# EAGLE board NTH-d (EAGLE 4.16)
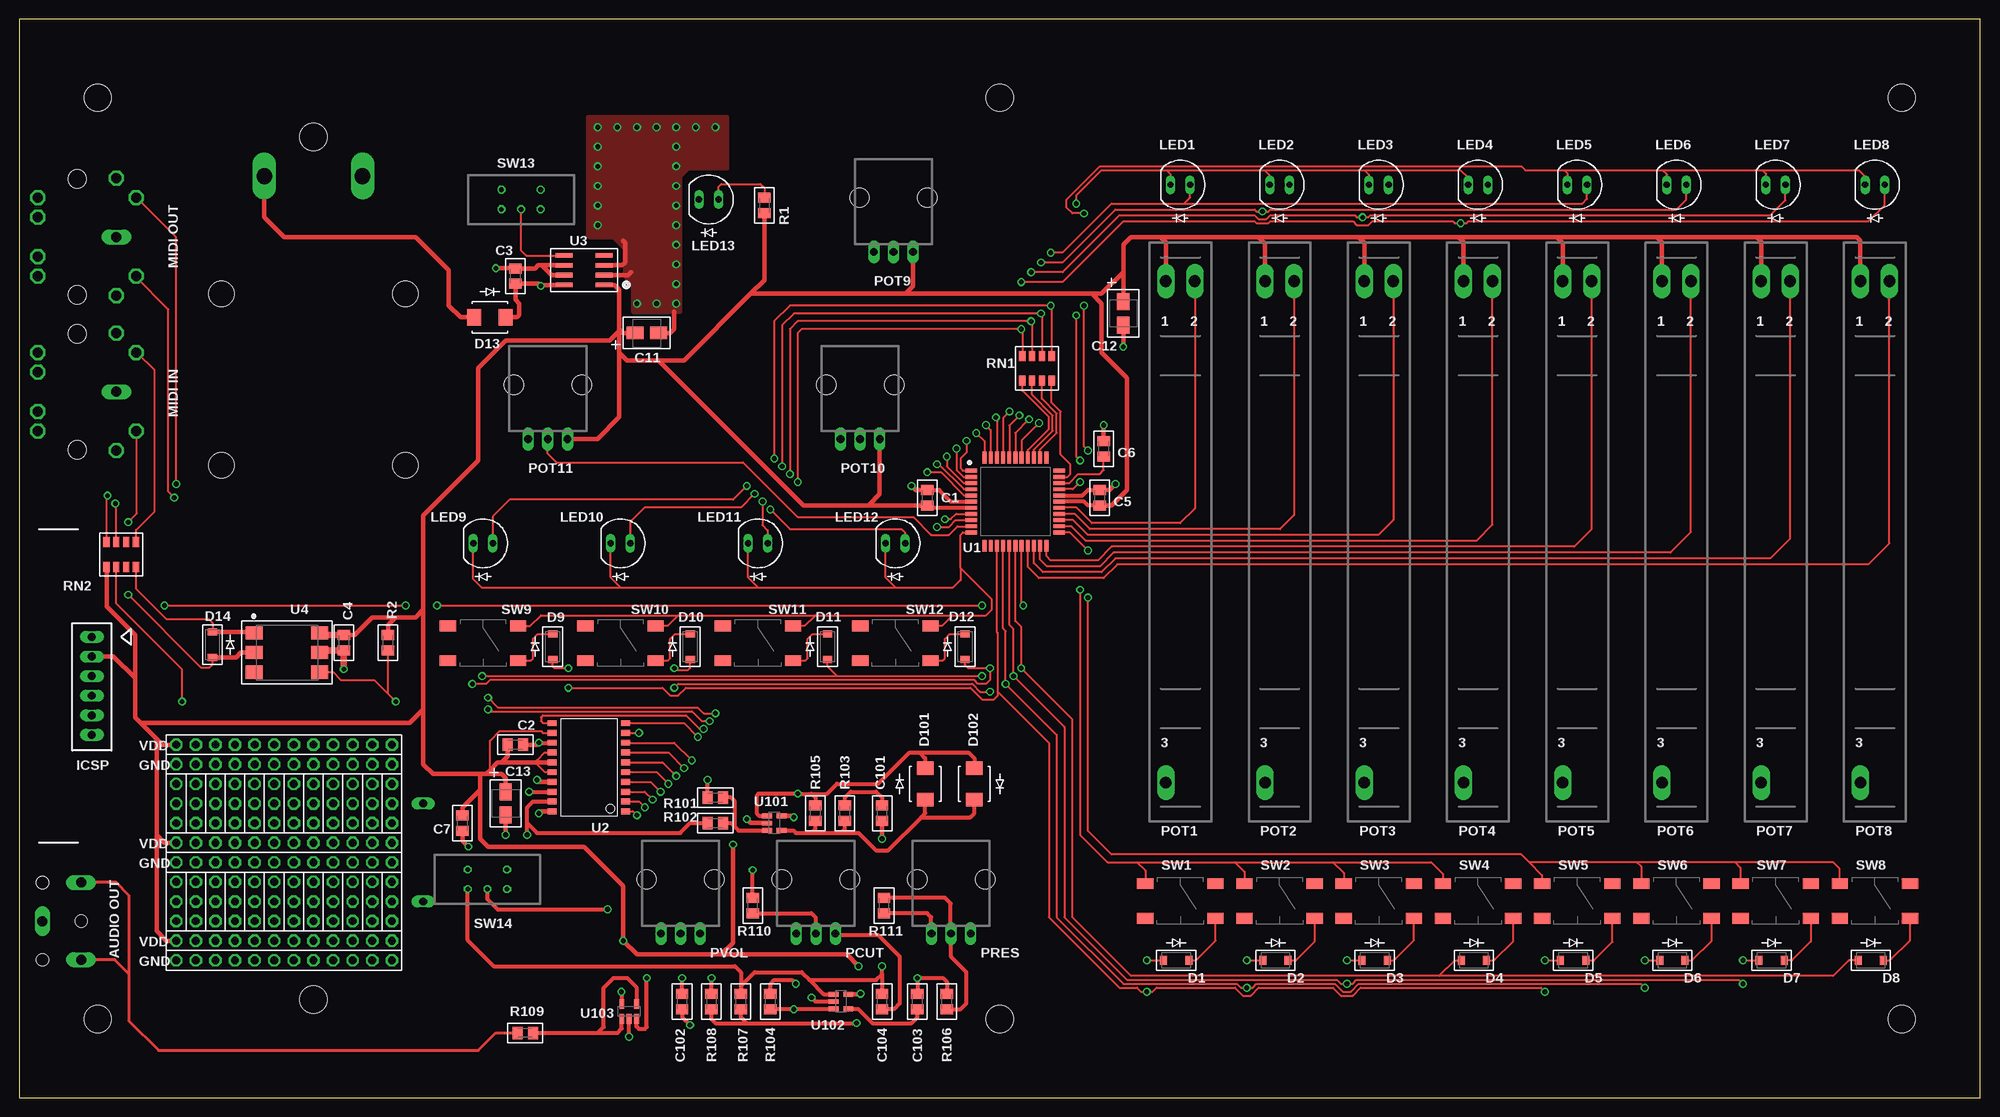
[diagram p0: board, top side]
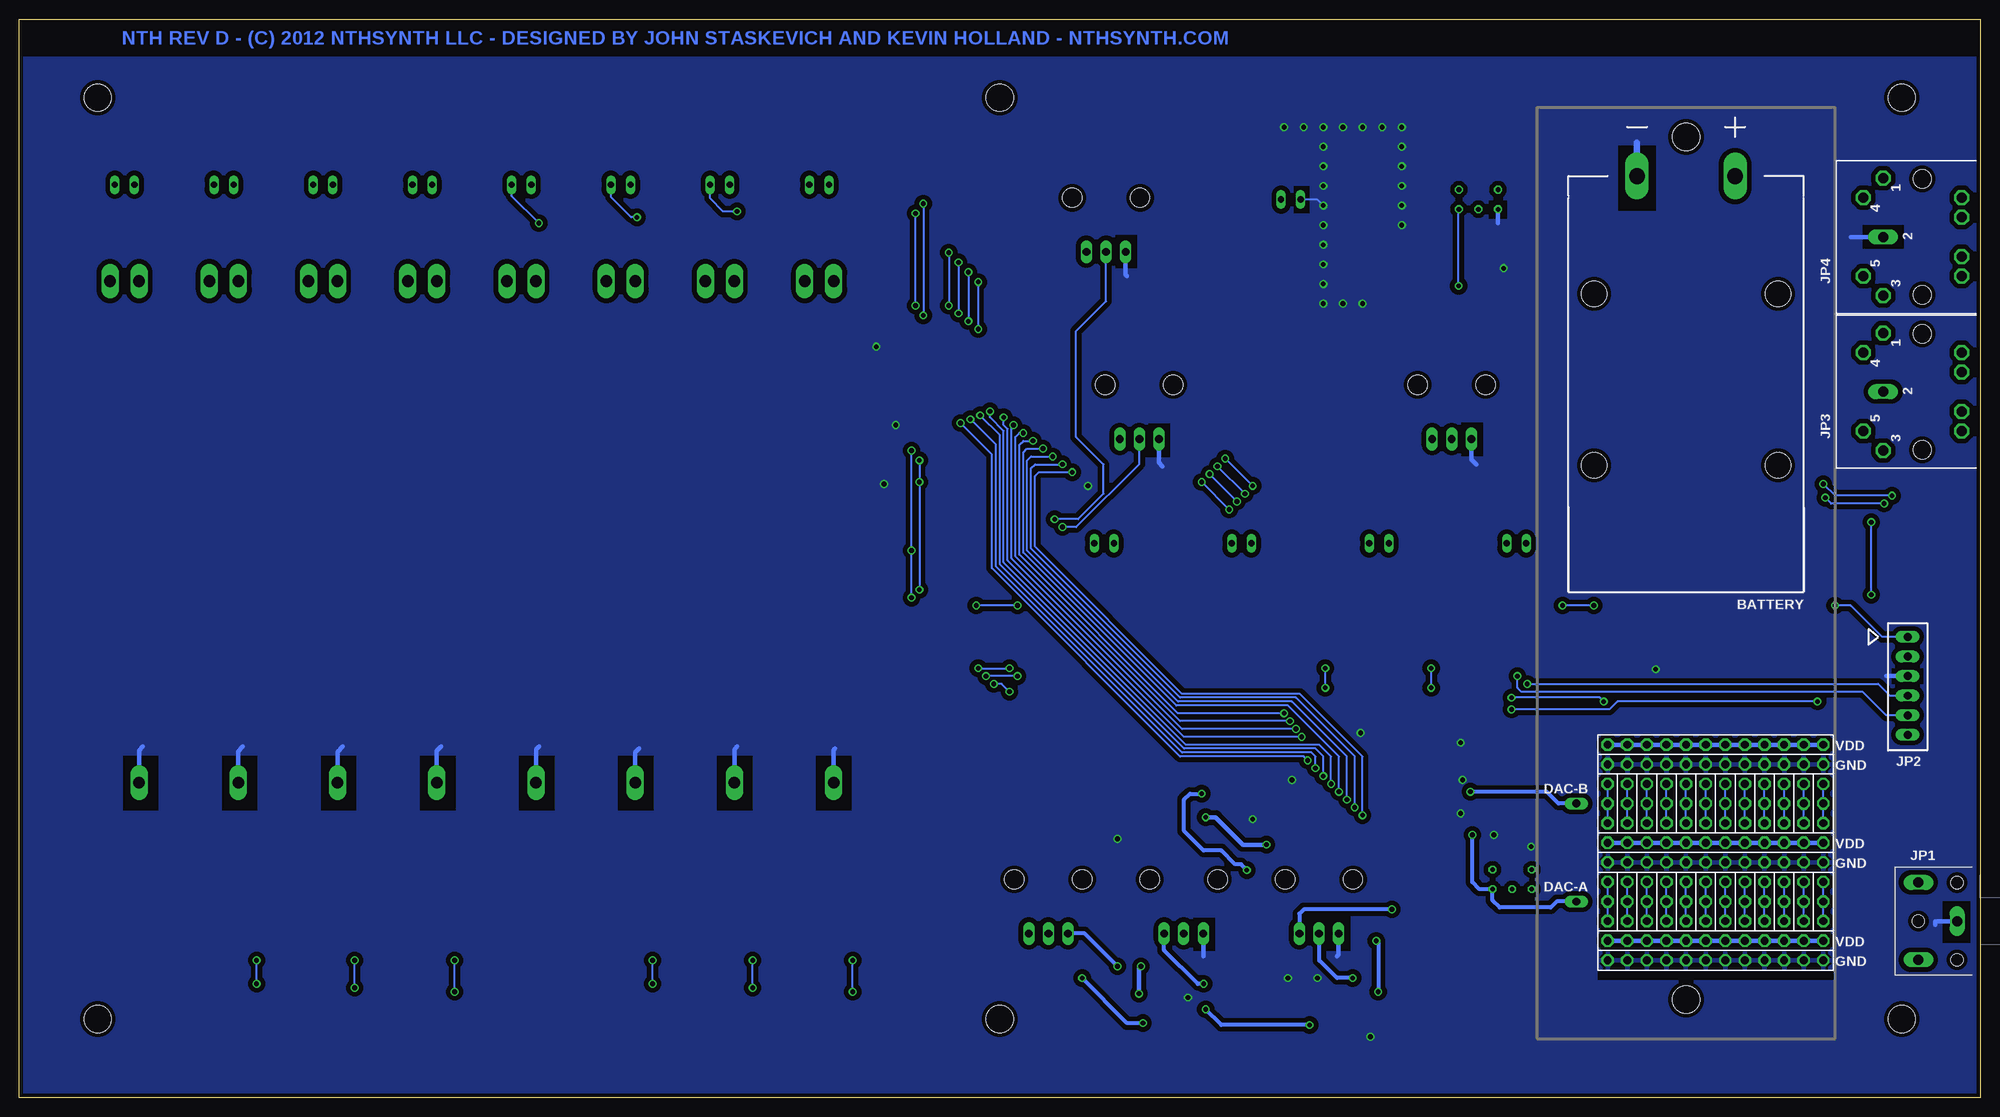
[diagram p1: board, bottom side, seen from below]

Size 254 x 139.7 mm. Coordinates in mm from the lower left corner, seen from the top.
Outline: 0,0 254,0 254,139.7 0,139.7 0,0
Copper layers (1*16): Top 0.0178mm / dielectric 1.4986mm / Bottom 0.0178mm
Design rules "SSC-EAGLE-2Lyr_v1.0.0.3": minimum track width 6mil, minimum drill 14mil, track to track 10mil, track to pad 10mil, pad to pad 10mil, via to via 10mil, smd to smd 10mil, copper to edge 20mil, drill to drill 16mil, minimum pad ring 8mil, minimum via ring 8mil, stop-mask expansion 3mil, vias tented up to drill 0mil, thermal gap 10mil
Net classes: 0 default: width 0.254 mm, drill 0.254 mm, clearance 0.305 mm; 1 power: width 0.508 mm, drill 0.61 mm, clearance 0.61 mm; 3 VDD: width 0.254 mm, drill 0.305 mm, clearance 0.61 mm
Holes 3.56 mm at 243.84,10.16 243.84,129.54 10.16,129.54 10.16,10.16 127,129.54 127,10.16 38.1,124.46 38.1,12.7
bRestrict: area 109.2,107.4 to 112,111.8; area 64.4,83.1 to 67.2,87.4; area 105,83 to 107.7,87.3; area 61.3,113.9 to 63.7,116.2; area 146.2,37.2 to 150.8,44.2; area 159,37.2 to 163.6,44.2; area 171.9,37.2 to 176.4,44.2; area 184.7,37.2 to 189.3,44.2; area 197.5,37.2 to 202.1,44.2; area 210.3,37.2 to 214.9,44.2; area 223.2,37.2 to 227.7,44.2; area 236,37.2 to 240.6,44.2; 8 more areas

## Footprints (pad centres in the part's own frame; a part is rotated, then mirrored left to right if it is on the bottom)
C0805K = smd 1.3 x 1.6: 1 -1,0; 2 1,0
NICHICON-3.0 = smd 1.6 x 2.2: P$1 0,1.5; P$2 0,-1.5
SOD123 = smd 1.219 x 0.914: P$1 0,1.638; P$2 0,-1.638
S2 = smd 2.159 x 1.778: P$1 0,2.032; P$2 0,-2.032
SOD123-MIRROR = smd 1.219 x 0.914: P$1 0,1.638; P$2 0,-1.638
WIREPAD-NICE = drill 1.016 long: P$1 0,0
KEYSTONE-1294-B = drill 2.032 long: P$1 6.35,15.24; P$2 -6.35,15.24 | hole 3.302: 11.913,0; -11.913,0; -11.913,-22.225; 11.913,-22.225
1,6/0,9 = drill 1.016 pad 1.6 octagon: 1 0,0
STX-3100-3N = drill 1.3 long: P$1 0,0; P$2 5,5; P$3 5,-5 | hole 1.6: 5,0; 0,-5; 0,5
MIDI-PCB = drill 1.295 octagon: 1 7.62,5.08; 3 -7.62,5.08; 4 5.08,7.62; 5 -5.08,7.62; PE -2.54,-5.08; PE1 -5.08,-5.08; PE@ 2.54,-5.08; PE@1 5.08,-5.08 | drill 1.295 long: 2 0,5.08 | hole 2.388: -7.518,0; 7.518,0
LED5MM = drill 0.813 long: A 1.27,0; K -1.27,0
9MM-POT = drill 1 long: P$1 0,-7.01; P$2 2.54,-7.01; P$3 -2.54,-7.01 | hole 2.54: -4.4,0; 4.4,0
SLIDE-POT = drill 1.499 long: P$1 -1.875,32.5; P$4 1.875,32.5; P$6 -1.875,-32.5
CTS-744 = smd 1.3 x 0.8: P$4 -1.6,-0.635; P$5 -1.6,-1.905; P$6 -1.6,0.635; P$7 -1.6,1.905; P$8 1.6,0.635; P$9 1.6,1.905; P$10 1.6,-0.635; P$11 1.6,-1.905
TL3301-B = smd 1.4 x 2.1: P$1 2.25,4.55; P$2 -2.25,4.55; P$3 -2.25,-4.55; P$4 2.25,-4.55
G12-ROCKER = drill 0.61 octagon: P$2 1.27,0; P$3 1.27,2.54; P$4 -1.27,2.54; P$5 -1.27,-2.54; P$6 1.27,-2.54
TQFP44 = smd 1.5 x 0.5: P$1 5.7,0; P$2 -5.7,0; P$5 5.7,-0.8; P$6 5.7,-1.6; P$7 5.7,-2.4; P$8 5.7,-3.2; P$9 5.7,-4; P$10 5.7,0.8; P$11 5.7,1.6; P$12 5.7,2.4; P$13 5.7,3.2; P$14 5.7,4; P$25 -5.7,-0.8; P$26 -5.7,-1.6; P$27 -5.7,-2.4; P$28 -5.7,-3.2; P$29 -5.7,-4; P$30 -5.7,0.8; P$31 -5.7,1.6; P$32 -5.7,2.4; P$33 -5.7,3.2; P$34 -5.7,4 | smd 0.5 x 1.5: P$3 0,-5.7; P$4 0,5.7; P$15 0.8,5.7; P$16 1.6,5.7; P$17 2.4,5.7; P$18 3.2,5.7; P$19 4,5.7; P$20 -0.8,5.7; P$21 -1.6,5.7; P$22 -2.4,5.7; P$23 -3.2,5.7; P$24 -4,5.7; P$35 -0.8,-5.7; P$36 -1.6,-5.7; P$37 -2.4,-5.7; P$38 -3.2,-5.7; P$39 -4,-5.7; P$40 0.8,-5.7; P$41 1.6,-5.7; P$42 2.4,-5.7; P$43 3.2,-5.7; P$44 4,-5.7
SO20L = smd 0.762 x 1.143: 1 -5.08,-5.131; 2 -3.81,-5.131; 3 -2.54,-5.131; 4 -1.27,-5.131; 5 0,-5.131; 6 1.27,-5.131; 7 2.54,-5.131; 8 3.81,-5.131; 9 5.08,-5.131; 10 6.35,-5.131; 11 6.35,4.369; 12 5.08,4.394; 13 3.81,4.394; 14 2.54,4.394; 15 1.27,4.394; 16 0,4.394; 17 -1.27,4.394; 18 -2.54,4.394; 19 -3.81,4.394; 20 -5.08,4.394
SO-8 = smd 2.2 x 0.6: 1 2.6,-1.905; 2 2.6,-0.635; 3 2.6,0.635; 4 2.6,1.905; 5 -2.6,1.905; 6 -2.6,0.635; 7 -2.6,-0.635; 8 -2.6,-1.905
SMT-6 = smd 2.2 x 1.7: P$4 4.25,2.54; P$5 4.25,0; P$6 4.25,-2.54; P$7 -4.25,-2.54; P$8 -4.25,0; P$9 -4.25,2.54
SOT23-5 = smd 0.635 x 1.27: 1 0.95,-0.95; 2 -0.95,-0.95; 3 -0.95,0.95; 4 0,0.95; 5 0.95,0.95

## Placement (x,y rotation side)
C1  [C0805K]  117.6,77.72 270 top
C2  [C0805K]  64.26,45.72 180 top
C3  [C0805K]  64.26,106.43 270 top
C4  [C0805K]  42.04,58.93 90 top
C5  [C0805K]  139.95,77.72 270 top
C6  [C0805K]  140.46,84.07 270 top
C7  [C0805K]  57.4,35.56 90 top
C11  [NICHICON-3.0]  81.28,99.06 90 top
C12  [NICHICON-3.0]  143,101.6 0 top
C13  [NICHICON-3.0]  62.99,38.1 0 top
C101  [C0805K]  111.76,36.83 90 top
C102  [C0805K]  85.85,12.45 90 top
C103  [C0805K]  116.33,12.45 90 top
C104  [C0805K]  111.76,12.45 90 top
D1  [SOD123]  149.86,17.78 270 top
D2  [SOD123]  162.71,17.78 270 top
D3  [SOD123]  175.56,17.78 270 top
D4  [SOD123]  188.42,17.78 270 top
D5  [SOD123]  201.27,17.78 270 top
D6  [SOD123]  214.12,17.78 270 top
D7  [SOD123]  226.97,17.78 270 top
D8  [SOD123]  239.83,17.78 270 top
D9  [SOD123]  69.09,58.42 0 top
D10  [SOD123]  86.89,58.42 0 top
D11  [SOD123]  104.7,58.42 0 top
D12  [SOD123]  122.5,58.42 0 top
D13  [S2]  60.96,101.09 270 top
D14  [SOD123-MIRROR]  25.02,58.67 0 top
D101  [S2]  117.35,40.64 0 top
D102  [S2]  123.7,40.64 180 top
DAC-A  [WIREPAD-NICE]  52.32,25.4 90 top
DAC-B  [WIREPAD-NICE]  52.32,38.1 90 top
E$1  [KEYSTONE-1294-B]  38.1,104.14 0 bottom
E$11  [1,6/0,9]  22.86,30.48 0 top
E$12  [WIREPAD-NICE]  9.4,59.69 270 top
E$13  [1,6/0,9]  22.86,33.02 0 top
E$14  [1,6/0,9]  22.86,35.56 0 top
E$15  [1,6/0,9]  20.32,30.48 0 top
E$16  [1,6/0,9]  22.86,27.94 0 top
E$17  [1,6/0,9]  20.32,27.94 0 top
E$18  [1,6/0,9]  20.32,33.02 0 top
E$19  [1,6/0,9]  20.32,35.56 0 top
E$20  [1,6/0,9]  22.86,25.4 0 top
E$21  [1,6/0,9]  20.32,25.4 0 top
E$22  [1,6/0,9]  20.32,22.86 0 top
E$23  [1,6/0,9]  22.86,22.86 0 top
E$24  [1,6/0,9]  22.86,38.1 0 top
E$25  [1,6/0,9]  22.86,40.64 0 top
E$26  [1,6/0,9]  20.32,38.1 0 top
E$27  [1,6/0,9]  20.32,40.64 0 top
E$28  [1,6/0,9]  25.4,27.94 0 top
E$29  [1,6/0,9]  25.4,30.48 0 top
E$30  [1,6/0,9]  25.4,33.02 0 top
E$31  [1,6/0,9]  25.4,35.56 0 top
E$32  [1,6/0,9]  25.4,25.4 0 top
E$33  [1,6/0,9]  25.4,22.86 0 top
E$34  [1,6/0,9]  25.4,38.1 0 top
E$35  [1,6/0,9]  25.4,40.64 0 top
E$36  [1,6/0,9]  27.94,27.94 0 top
E$37  [1,6/0,9]  27.94,30.48 0 top
E$38  [WIREPAD-NICE]  9.4,46.99 270 top
E$39  [1,6/0,9]  27.94,33.02 0 top
E$40  [1,6/0,9]  27.94,35.56 0 top
E$41  [1,6/0,9]  27.94,25.4 0 top
E$42  [1,6/0,9]  27.94,22.86 0 top
E$43  [1,6/0,9]  27.94,38.1 0 top
E$44  [1,6/0,9]  27.94,40.64 0 top
E$45  [1,6/0,9]  30.48,27.94 0 top
E$46  [1,6/0,9]  30.48,30.48 0 top
E$47  [1,6/0,9]  30.48,33.02 0 top
E$48  [1,6/0,9]  30.48,35.56 0 top
E$49  [1,6/0,9]  30.48,25.4 0 top
E$50  [1,6/0,9]  30.48,22.86 0 top
E$51  [1,6/0,9]  30.48,38.1 0 top
E$52  [1,6/0,9]  30.48,40.64 0 top
E$53  [1,6/0,9]  33.02,27.94 0 top
E$54  [1,6/0,9]  33.02,30.48 0 top
E$55  [1,6/0,9]  33.02,33.02 0 top
E$56  [1,6/0,9]  33.02,35.56 0 top
E$57  [1,6/0,9]  33.02,25.4 0 top
E$58  [1,6/0,9]  33.02,22.86 0 top
E$59  [1,6/0,9]  33.02,38.1 0 top
E$60  [1,6/0,9]  33.02,40.64 0 top
E$61  [1,6/0,9]  22.86,43.18 0 top
E$62  [1,6/0,9]  20.32,43.18 0 top
E$63  [1,6/0,9]  25.4,43.18 0 top
E$64  [1,6/0,9]  27.94,43.18 0 top
E$65  [1,6/0,9]  30.48,43.18 0 top
E$66  [1,6/0,9]  33.02,43.18 0 top
E$67  [1,6/0,9]  22.86,45.72 0 top
E$68  [1,6/0,9]  20.32,45.72 0 top
E$69  [1,6/0,9]  25.4,45.72 0 top
E$70  [1,6/0,9]  27.94,45.72 0 top
E$71  [1,6/0,9]  30.48,45.72 0 top
E$72  [1,6/0,9]  33.02,45.72 0 top
E$73  [1,6/0,9]  22.86,20.32 0 top
E$74  [1,6/0,9]  20.32,20.32 0 top
E$75  [1,6/0,9]  25.4,20.32 0 top
E$76  [1,6/0,9]  27.94,20.32 0 top
E$77  [1,6/0,9]  30.48,20.32 0 top
E$78  [1,6/0,9]  33.02,20.32 0 top
E$79  [1,6/0,9]  22.86,17.78 0 top
E$80  [1,6/0,9]  20.32,17.78 0 top
E$81  [1,6/0,9]  25.4,17.78 0 top
E$82  [1,6/0,9]  27.94,17.78 0 top
E$83  [1,6/0,9]  30.48,17.78 0 top
E$84  [1,6/0,9]  33.02,17.78 0 top
E$85  [1,6/0,9]  35.56,27.94 0 top
E$86  [1,6/0,9]  35.56,30.48 0 top
E$87  [1,6/0,9]  35.56,33.02 0 top
E$88  [1,6/0,9]  35.56,35.56 0 top
E$89  [1,6/0,9]  35.56,25.4 0 top
E$90  [1,6/0,9]  35.56,22.86 0 top
E$91  [1,6/0,9]  35.56,38.1 0 top
E$92  [1,6/0,9]  35.56,40.64 0 top
E$93  [1,6/0,9]  35.56,43.18 0 top
E$94  [1,6/0,9]  35.56,45.72 0 top
E$95  [1,6/0,9]  35.56,20.32 0 top
E$96  [1,6/0,9]  35.56,17.78 0 top
E$97  [1,6/0,9]  38.1,27.94 0 top
E$98  [1,6/0,9]  38.1,30.48 0 top
E$99  [1,6/0,9]  38.1,33.02 0 top
E$100  [1,6/0,9]  38.1,35.56 0 top
E$101  [1,6/0,9]  38.1,25.4 0 top
E$102  [1,6/0,9]  38.1,22.86 0 top
E$103  [1,6/0,9]  38.1,38.1 0 top
E$104  [1,6/0,9]  38.1,40.64 0 top
E$105  [1,6/0,9]  38.1,43.18 0 top
E$106  [1,6/0,9]  38.1,45.72 0 top
E$107  [1,6/0,9]  38.1,20.32 0 top
E$108  [1,6/0,9]  38.1,17.78 0 top
E$109  [1,6/0,9]  40.64,27.94 0 top
E$110  [1,6/0,9]  40.64,30.48 0 top
E$111  [1,6/0,9]  40.64,33.02 0 top
E$112  [1,6/0,9]  40.64,35.56 0 top
E$113  [1,6/0,9]  40.64,25.4 0 top
E$114  [1,6/0,9]  40.64,22.86 0 top
E$115  [1,6/0,9]  40.64,38.1 0 top
E$116  [1,6/0,9]  40.64,40.64 0 top
E$117  [1,6/0,9]  40.64,43.18 0 top
E$118  [1,6/0,9]  40.64,45.72 0 top
E$119  [1,6/0,9]  40.64,20.32 0 top
E$120  [1,6/0,9]  40.64,17.78 0 top
E$121  [1,6/0,9]  43.18,27.94 0 top
E$122  [1,6/0,9]  43.18,30.48 0 top
E$123  [1,6/0,9]  43.18,33.02 0 top
E$124  [1,6/0,9]  43.18,35.56 0 top
E$125  [1,6/0,9]  43.18,25.4 0 top
E$126  [1,6/0,9]  43.18,22.86 0 top
E$127  [1,6/0,9]  43.18,38.1 0 top
E$128  [1,6/0,9]  43.18,40.64 0 top
E$129  [1,6/0,9]  43.18,43.18 0 top
E$130  [1,6/0,9]  43.18,45.72 0 top
E$131  [1,6/0,9]  43.18,20.32 0 top
E$132  [1,6/0,9]  43.18,17.78 0 top
E$133  [1,6/0,9]  45.72,27.94 0 top
E$134  [1,6/0,9]  45.72,30.48 0 top
E$135  [1,6/0,9]  45.72,33.02 0 top
E$136  [1,6/0,9]  45.72,35.56 0 top
E$137  [1,6/0,9]  45.72,25.4 0 top
E$138  [1,6/0,9]  45.72,22.86 0 top
E$139  [1,6/0,9]  45.72,38.1 0 top
E$140  [1,6/0,9]  45.72,40.64 0 top
E$141  [1,6/0,9]  45.72,43.18 0 top
E$142  [1,6/0,9]  45.72,45.72 0 top
E$143  [1,6/0,9]  45.72,20.32 0 top
E$144  [1,6/0,9]  45.72,17.78 0 top
E$145  [1,6/0,9]  48.26,27.94 0 top
E$146  [1,6/0,9]  48.26,30.48 0 top
E$147  [1,6/0,9]  48.26,33.02 0 top
E$148  [1,6/0,9]  48.26,35.56 0 top
E$149  [1,6/0,9]  48.26,25.4 0 top
E$150  [1,6/0,9]  48.26,22.86 0 top
E$151  [1,6/0,9]  48.26,38.1 0 top
E$152  [1,6/0,9]  48.26,40.64 0 top
E$153  [1,6/0,9]  48.26,43.18 0 top
E$154  [1,6/0,9]  48.26,45.72 0 top
E$155  [1,6/0,9]  48.26,20.32 0 top
E$156  [1,6/0,9]  48.26,17.78 0 top
E$180  [WIREPAD-NICE]  9.4,57.15 270 top
E$181  [WIREPAD-NICE]  9.4,54.61 270 top
E$182  [WIREPAD-NICE]  9.4,52.07 270 top
E$183  [WIREPAD-NICE]  9.4,49.53 270 top
JP1  [STX-3100-3N]  3,22.86 180 bottom
JP3  [MIDI-PCB]  7.49,91.44 90 bottom
JP4  [MIDI-PCB]  7.49,111.51 90 bottom
LED1  [LED5MM]  150.39,118.26 0 top
LED2  [LED5MM]  163.25,118.26 0 top
LED3  [LED5MM]  176.1,118.26 0 top
LED4  [LED5MM]  188.95,118.26 0 top
LED5  [LED5MM]  201.8,118.26 0 top
LED6  [LED5MM]  214.66,118.26 0 top
LED7  [LED5MM]  227.51,118.26 0 top
LED8  [LED5MM]  240.36,118.26 0 top
LED9  [LED5MM]  60.07,71.81 0 top
LED10  [LED5MM]  77.88,71.81 0 top
LED11  [LED5MM]  95.68,71.81 0 top
LED12  [LED5MM]  113.49,71.81 0 top
LED13  [LED5MM]  89.31,116.36 0 top
PCUT  [9MM-POT]  103.17,28.27 0 top
POT1  [SLIDE-POT]  150.39,73.28 0 top
POT2  [SLIDE-POT]  163.25,73.28 0 top
POT3  [SLIDE-POT]  176.1,73.28 0 top
POT4  [SLIDE-POT]  188.95,73.28 0 top
POT5  [SLIDE-POT]  201.8,73.28 0 top
POT6  [SLIDE-POT]  214.66,73.28 0 top
POT7  [SLIDE-POT]  227.51,73.28 0 top
POT8  [SLIDE-POT]  240.36,73.28 0 top
POT9  [9MM-POT]  113.23,116.59 0 top
POT10  [9MM-POT]  108.92,92.33 0 top
POT11  [9MM-POT]  68.45,92.33 0 top
PRES  [9MM-POT]  120.7,28.27 0 top
PVOL  [9MM-POT]  85.65,28.27 0 top
R1  [C0805K]  96.52,115.57 90 top
R2  [C0805K]  47.75,58.93 270 top
R101  [C0805K]  90.17,38.86 180 top
R102  [C0805K]  90.17,35.56 180 top
R103  [C0805K]  106.93,36.83 270 top
R104  [C0805K]  97.28,12.45 90 top
R105  [C0805K]  103.12,36.83 270 top
R106  [C0805K]  120.14,12.45 90 top
R107  [C0805K]  93.47,12.45 270 top
R108  [C0805K]  89.66,12.45 90 top
R109  [C0805K]  65.53,8.38 0 top
R110  [C0805K]  95,24.89 270 top
R111  [C0805K]  112.01,24.89 270 top
RN1  [CTS-744]  131.83,94.49 270 top
RN2  221  [CTS-744]  13.21,70.36 90 top
SW1  [TL3301-B]  150.39,25.48 270 top
SW2  [TL3301-B]  163.25,25.48 270 top
SW3  [TL3301-B]  176.1,25.48 270 top
SW4  [TL3301-B]  188.95,25.48 270 top
SW5  [TL3301-B]  201.8,25.48 270 top
SW6  [TL3301-B]  214.66,25.48 270 top
SW7  [TL3301-B]  227.51,25.48 270 top
SW8  [TL3301-B]  240.36,25.48 270 top
SW9  [TL3301-B]  60.07,58.85 270 top
SW10  [TL3301-B]  77.88,58.85 270 top
SW11  [TL3301-B]  95.68,58.85 270 top
SW12  [TL3301-B]  113.49,58.85 270 top
SW13  [G12-ROCKER]  65,116.36 270 top
SW14  [G12-ROCKER]  60.63,28.27 270 top
U1  [TQFP44]  129.03,77.22 0 top
U2  [SO20L]  73.41,42.16 90 top
U3  [SO-8]  73.15,107.19 180 top
U4  [SMT-6]  34.67,57.66 0 top
U101  [SOT23-5]  97.79,35.56 90 top
U102  [SOT23-5]  106.43,12.45 90 top
U103  [SOT23-5]  78.99,11.18 180 top

## Library data of the parts
C1-C7 C101-C104 R1 R2 R101-R111 = rcl
C11-C13 D1-D13 D101 D102 DAC-A DAC-B E$1 JP1 JP3 JP4 LED1-LED13 PCUT POT1-POT11 PRES PVOL RN1 SW1-SW14 U1 U3 U101-U103 = synth
D14 E$12 E$38 E$180-E$183 RN2 U4 = 0jrs
E$11 E$13-E$37 E$39-E$156 = wirepad
U2 = atmel

## Nets
!A/B: U1.P$23 U2.11
!WR: U1.P$22 U2.10
DACOUTA: DAC-A.P$1 R102.2 SW14.P$3 U2.19
DACOUTB: DAC-B.P$1 U2.18
DATA0: D1.P$2 D5.P$2 D9.P$2 U1.P$37
DATA1: D2.P$2 D6.P$2 D10.P$2 U1.P$36
DATA2-ICSPCLK: D3.P$2 D7.P$2 D11.P$2 E$183.P$1 U1.P$35
DATA3-ICSPDAT: D4.P$2 D8.P$2 D12.P$2 E$182.P$1 U1.P$3
DB0: U1.P$15 U2.8
DB1: U1.P$4 U2.7
DB2: U1.P$20 U2.6
DB3: U1.P$21 U2.5
DB4: U1.P$33 U2.4
DB5: U1.P$32 U2.3
DB6: U1.P$31 U2.2
DB7: U1.P$30 U2.1
FILTEROUT: C104.2 PRES.P$3 R107.1 R111.2 SW14.P$6 U102.5
GND [power]: C1.1 C2.1 C3.1 C4.1 C5.1 C6.1 C7.1 C11.P$2 C12.P$2 C13.P$2 C101.1 C102.2 E$1.P$2 E$11.1 E$15.1 E$29.1 E$37.1 E$46.1 E$54.1 E$61.1 E$62.1 E$63.1 E$64.1 E$65.1 E$66.1 E$79.1 E$80.1 E$81.1 E$82.1 E$83.1 E$84.1 E$86.1 E$93.1 E$96.1 E$98.1 E$105.1 E$108.1 E$110.1 E$117.1 E$120.1 E$122.1 E$129.1 E$132.1 E$134.1 E$141.1 E$144.1 E$146.1 E$153.1 E$156.1 E$181.P$1 JP1.P$1 JP4.2 LED13.K PCUT.P$3 POT1.P$6 POT2.P$6 POT3.P$6 POT4.P$6 POT5.P$6 POT6.P$6 POT7.P$6 POT8.P$6 POT9.P$3 POT10.P$3 POT11.P$3 PVOL.P$3 R101.2 R108.2 SW13.P$6 U1.P$2 U1.P$10 U2.9 U2.13 U2.17 U2.20 U3.2 U3.3 U3.6 U3.7 U4.P$5 U101.4 U102.4 U103.4
LED0: RN1.P$9 U1.P$13
LED0': LED1.A LED5.A LED9.A RN1.P$7
LED1: RN1.P$8 U1.P$18
LED1': LED2.A LED6.A LED10.A RN1.P$6
LED2: RN1.P$10 U1.P$17
LED2': LED3.A LED7.A LED11.A RN1.P$4
LED3: RN1.P$11 U1.P$16
LED3': LED4.A LED8.A LED12.A RN1.P$5
LINEOUT: JP1.P$2 JP1.P$3 R109.1
MIDIIN4: JP3.4 RN2.P$11
MIDIIN5: D14.P$2 JP3.5 U4.P$8
MIDIOUT4: JP4.4 RN2.P$9
MIDIOUT5: JP4.5 RN2.P$8
MOD: POT11.P$1 U1.P$28
N$16: D14.P$1 RN2.P$5 U4.P$9
R107: R109.2 U103.2 U103.5
RX-RC7: R2.2 U1.P$34 U4.P$6
S$1: D1.P$1 SW1.P$1
S$2: D2.P$1 SW2.P$1
S$3: D3.P$1 SW3.P$1
S$4: D4.P$1 SW4.P$1
S$5: D5.P$1 SW5.P$1
S$6: D6.P$1 SW6.P$1
S$7: D7.P$1 SW7.P$1
S$8: D8.P$1 SW8.P$1
S$9: R101.1 R102.1 U101.3
S$10: PVOL.P$2 SW14.P$2
S$11: D101.P$2 D102.P$1 R103.2 R105.2 U101.2
S$13: D9.P$1 SW9.P$1
S$14: D10.P$1 SW10.P$1
S$15: D11.P$1 SW11.P$1
S$16: D12.P$1 SW12.P$1
S$22: LED13.A R1.2
S$23: PRES.P$1 R106.1 R111.1
S$25: E$14.1 E$24.1 E$25.1
S$27: SW13.P$2 U3.1
S$28: C101.2 R103.1
S$29: D101.P$1 D102.P$2 R105.1 R110.1 U101.5
S$30: C102.1 R104.1 U102.3
S$31: C104.1 PCUT.P$2 R104.2
S$32: C103.2 R106.2 R107.2 R108.1
S$33: C103.1 U102.2
S$34: E$16.1 E$20.1 E$23.1
S$35: PVOL.P$1 U103.3
S$36: E$31.1 E$34.1 E$35.1
S$37: E$28.1 E$32.1 E$33.1
S$38: E$40.1 E$43.1 E$44.1
S$39: E$36.1 E$41.1 E$42.1
S$40: E$48.1 E$51.1 E$52.1
S$41: E$45.1 E$49.1 E$50.1
S$42: E$56.1 E$59.1 E$60.1
S$43: E$53.1 E$57.1 E$58.1
S$44: E$88.1 E$91.1 E$92.1
S$45: E$85.1 E$89.1 E$90.1
S$46: E$100.1 E$103.1 E$104.1
S$47: E$97.1 E$101.1 E$102.1
S$48: E$112.1 E$115.1 E$116.1
S$49: E$109.1 E$113.1 E$114.1
S$50: E$124.1 E$127.1 E$128.1
S$51: E$121.1 E$125.1 E$126.1
S$52: E$136.1 E$139.1 E$140.1
S$53: E$133.1 E$137.1 E$138.1
S$54: E$148.1 E$151.1 E$152.1
S$55: E$145.1 E$149.1 E$150.1
S$57: PCUT.P$1 R110.2
S$58: E$19.1 E$26.1 E$27.1
S$59: E$17.1 E$21.1 E$22.1
SELECT0: LED1.K LED2.K LED3.K LED4.K SW1.P$3 SW2.P$3 SW3.P$3 SW4.P$3 U1.P$11
SELECT1: LED5.K LED6.K LED7.K LED8.K SW5.P$3 SW6.P$3 SW7.P$3 SW8.P$3 U1.P$9
SELECT2: LED9.K LED10.K LED11.K LED12.K SW9.P$2 SW10.P$2 SW11.P$2 SW12.P$2 U1.P$29
SLIDER0: POT1.P$4 U1.P$5
SLIDER1: POT2.P$4 U1.P$6
SLIDER2: POT3.P$4 U1.P$7
SLIDER3: POT4.P$4 U1.P$8
SLIDER4: POT5.P$4 U1.P$44
SLIDER5: POT6.P$4 U1.P$43
SLIDER6: POT7.P$4 U1.P$42
SLIDER7: POT8.P$4 U1.P$41
STEPS: POT10.P$1 U1.P$27
TEMPO: POT9.P$1 U1.P$26
TX-RC6: RN2.P$6 U1.P$24
VCAP: C6.2 U1.P$12
VDD [power]: C1.2 C2.2 C4.2 C5.2 C7.2 C11.P$1 C12.P$1 C13.P$1 E$13.1 E$18.1 E$30.1 E$39.1 E$47.1 E$55.1 E$67.1 E$68.1 E$69.1 E$70.1 E$71.1 E$72.1 E$73.1 E$74.1 E$75.1 E$76.1 E$77.1 E$78.1 E$87.1 E$94.1 E$95.1 E$99.1 E$106.1 E$107.1 E$111.1 E$118.1 E$119.1 E$123.1 E$130.1 E$131.1 E$135.1 E$142.1 E$143.1 E$147.1 E$154.1 E$155.1 E$180.P$1 POT1.P$1 POT2.P$1 POT3.P$1 POT4.P$1 POT5.P$1 POT6.P$1 POT7.P$1 POT8.P$1 POT9.P$2 POT10.P$2 POT11.P$2 R1.1 R2.1 RN2.P$7 U1.P$1 U1.P$25 U2.12 U2.14 U2.15 U2.16 U3.5 U4.P$4 U101.1 U102.1 U103.1
VIN: D13.P$2 E$1.P$1
VIN': C3.2 D13.P$1 SW13.P$3 U3.4
VPP: E$12.P$1 U1.P$40

## Tracks (layer width: path | path; a pad name or v marks a point on that pad's centre or on a via)
!A/B  (via drill 0.61)
  Top 0.254: U2.11 67.82,48.51 67.56,48.77 67.56,49.28 67.82,49.53 86.36,49.53 88.14,47.75 v88.65,47.75 | U1.P$23 125.83,86.51 v125.22,87.12
  Bottom 0.254: v88.65,47.75 103.38,47.75 125.48,69.85 125.48,86.87 v125.22,87.12
!WR  (via drill 0.61)
  Top 0.254: U2.10 86.11,48.51 v87.88,46.74 | U1.P$22 126.63,88 v126.49,88.14
  Bottom 0.254: v87.88,46.74 103.12,46.74 125.98,69.6 125.98,86.61 126.49,87.12 v126.49,88.14
DACOUTA  (via drill 0.61)
  Top 0.508: U2.19 66.55,38.35 65.79,37.59 65.79,35.56 | 65.79,35.56 67.06,34.29 85.6,34.29 86.87,35.56 R102.2 | v65.79,34.04 65.79,35.56
  Bottom 0.508: v65.79,34.04 65.79,27.94 64.85,27 SW14.P$3 63.17,25.58 62.23,24.64 55.63,24.64 54.86,25.4 DAC-A.P$1
DACOUTB  (via drill 0.61)
  Top 0.508: v66.04,39.62 U2.18
  Bottom 0.508: v66.04,39.62 56.13,39.62 54.61,38.1 DAC-B.P$1
DATA0  (via drill 0.61, 0.61 pad 0.61)
  Top 0.254: v146.05,17.78 D1.P$2 | v197.61,17.78 D5.P$2 | v197.61,13.72 197.1,14.22 173.74,14.22 172.72,13.21 171.2,13.21 170.18,14.22 160.53,14.22 159.51,13.21 158.5,13.21 157.48,14.22 147.32,14.22 146.81,13.72 v146.05,13.72 145.29,13.72 144.78,14.22 142.49,14.22 133.35,23.37 133.35,45.97 126.75,52.58 | U1.P$37 126.63,60.31 126.75,60.2 126.75,52.58 | 126.75,52.58 126.75,52.07 126.24,51.56 124.71,51.56 123.19,53.09 86.36,53.09 85.34,52.07 84.33,52.07 83.31,53.09 v71.12,53.09 | D9.P$2 69.09,55.88 69.34,55.63 v71.12,55.63
  Bottom 0.254: v197.61,13.72 v197.61,17.78 | v71.12,53.09 v71.12,55.63 | v146.05,13.72 v146.05,17.78
DATA1  (via drill 0.61, 0.61 pad 0.61)
  Top 0.254: U1.P$36 127.43,60.78 127.76,60.45 v127.76,53.59 134.37,46.99 134.37,23.37 143,14.73 157.73,14.73 158.24,14.22 v159,14.22 159.77,14.22 160.27,14.73 170.43,14.73 171.45,13.72 172.47,13.72 173.48,14.73 210.06,14.73 v210.57,14.22 | v159,17.78 D2.P$2 | v210.57,17.78 D6.P$2 | D10.P$2 86.89,55.65 86.61,55.37 85.09,55.37 v84.84,55.63 | v84.84,53.09 85.34,53.59 123.44,53.59 124.46,52.58 v125.73,52.58
  Bottom 0.254: v210.57,14.22 v210.57,17.78 | v84.84,53.09 v84.84,55.63 | v125.73,52.58 126.75,53.59 v127.76,53.59 | v159,14.22 v159,17.78
DATA2-ICSPCLK  (via drill 0.61, 0.61 pad 0.61)
  Top 0.254: U1.P$35 128.23,61.25 128.78,60.71 v128.78,54.61 135.38,48.01 135.38,23.37 143.51,15.24 170.69,15.24 171.2,14.73 v171.96,14.73 172.72,14.73 173.23,15.24 222.76,15.24 v223.27,14.73 | v171.96,17.78 D3.P$2 | v223.27,17.78 D7.P$2 | D11.P$2 104.7,55.83 105.92,54.61 | 105.92,54.61 v124.71,54.61 | v59.94,54.61 105.92,54.61
  Bottom 0.254: v223.27,14.73 v223.27,17.78 | v124.71,54.61 v128.78,54.61 | E$183.P$1 12.19,49.53 15.24,52.58 59.44,52.58 59.94,53.09 v59.94,54.61 | v171.96,14.73 v171.96,17.78
DATA3-ICSPDAT  (via drill 0.61)
  Top 0.254: U1.P$3 129.03,61.72 129.79,60.96 v129.79,55.63 136.4,49.02 136.4,23.37 144.02,15.75 183.9,15.75 | 183.9,15.75 234.95,15.75 236.98,17.78 D8.P$2 | v58.67,53.59 60.45,53.59 60.96,54.1 123.7,54.1 124.21,53.59 125.22,53.59 125.73,54.1 v125.73,55.63 122.94,55.63 122.5,56.06 D12.P$2 | D4.P$2 185.93,17.78 183.9,15.75
  Bottom 0.254: v58.67,53.59 13.21,53.59 11.68,52.07 E$182.P$1 | v129.79,55.63 v125.73,55.63
DB0  (via drill 0.61)
  Top 0.254: U2.8 84.84,45.97 v87.12,43.69 | U1.P$15 129.83,85.13 v132.08,87.38
  Bottom 0.254: v132.08,87.38 128.02,83.31 128.02,68.58 103.63,44.2 87.63,44.2 v87.12,43.69
DB1  (via drill 0.61)
  Top 0.254: U2.7 84.07,44.7 v86.11,42.67 | U1.P$4 129.03,86.11 v130.81,87.88
  Bottom 0.254: v86.11,42.67 86.11,44.2 86.61,44.7 103.38,44.7 127.51,68.83 127.51,84.58 v130.81,87.88
DB2  (via drill 0.61)
  Top 0.254: U2.6 83.31,43.43 v85.09,41.66 | U1.P$20 128.23,87.08 v129.54,88.39
  Bottom 0.254: v85.09,41.66 85.09,44.2 86.11,45.21 103.12,45.21 127,69.09 127,85.85 v129.54,88.39
DB3  (via drill 0.61)
  Top 0.254: U2.5 82.55,42.16 v84.07,40.64 | U1.P$21 127.43,88.06 v128.27,88.9
  Bottom 0.254: v84.07,40.64 84.07,44.2 85.6,45.72 102.87,45.72 126.49,69.34 126.49,86.36 128.27,88.14 v128.27,88.9
DB4  (via drill 0.61)
  Top 0.254: U2.4 81.79,40.89 v83.06,39.62 | U1.P$33 122.28,80.42 121.41,81.28 v121.41,84.07
  Bottom 0.254: v83.06,39.62 83.06,44.2 89.66,50.8 104.14,50.8 123.95,70.61 123.95,83.57 123.44,84.07 v121.41,84.07
DB5  (via drill 0.61)
  Top 0.254: U2.3 81.03,39.62 v82.04,38.61 | U1.P$32 122.31,79.62 120.14,81.79 v120.14,83.06
  Bottom 0.254: v82.04,38.61 82.04,44.2 89.15,51.31 103.89,51.31 123.44,70.87 123.44,82.55 122.94,83.06 v120.14,83.06
DB6  (via drill 0.61)
  Top 0.254: U2.2 80.26,38.35 v81.03,37.59 | U1.P$31 122.35,78.82 119.13,82.04 v118.87,82.04
  Bottom 0.254: v81.03,37.59 81.03,44.2 88.65,51.82 103.63,51.82 122.94,71.12 122.94,81.53 122.43,82.04 v118.87,82.04
DB7  (via drill 0.61)
  Top 0.254: U2.1 79.5,37.08 v80.01,36.58 | U1.P$30 122.39,78.02 119.38,81.03 v117.6,81.03
  Bottom 0.254: v80.01,36.58 80.01,44.2 88.14,52.32 103.38,52.32 122.43,71.37 122.43,80.52 121.92,81.03 v117.6,81.03
FILTEROUT  (via drill 0.61)
  Top 0.508: 111.76,16 C104.2 | 111.76,16 v111.76,17.02 | 111.76,16 111,15.24 102.36,15.24 | U102.5 104.21,13.4 102.36,15.24 | 102.36,15.24 101.35,16.26 95.25,16.26 93.47,14.48 | 93.47,14.48 R107.1 | 93.47,14.48 93.47,16.26 92.71,17.02 61.47,17.02 58.09,20.4 SW14.P$6 | R111.2 117.59,23.89 118.11,23.37 118.11,21.08 118.16,21.13 PRES.P$3
  Bottom 0.508: PRES.P$3 116,21.26 v111.76,17.02
GND  (via drill 0.61)
  Top 0.254: U2.9 v80.26,47.24
  Top 0.508: v78.99,7.87 U103.4 | C102.2 v85.85,15.49 | R108.2 v89.66,15.49 | v67.31,45.97 U2.13 | U102.4 103.12,12.45 v102.62,12.95 | U1.P$2 120.65,77.22 119.14,78.72 C1.1 | C5.1 139.95,78.74 138.43,78.74 137.71,78.02 U1.P$10 | R101.2 89.17,41.13 v89.15,41.15
  Top 0.61: 79.25,106.93 78.87,106.55 U3.6 | 84.84,101.85 84.84,99.57 84.33,99.06 C11.P$2 | 78.23,111 78.49,110.74 78.49,108.2 78.11,107.82 U3.7 | C7.1 57.4,33.27 v58.17,32.51 | v62.99,34.04 C13.P$2 | U2.20 67.56,37.08 v67.31,36.83 | U2.17 67.31,40.89 v67.06,41.15 | v67.31,45.97 67.06,45.72 C2.1 | U101.4 94.74,35.56 v94.23,36.07 | v111.76,33.53 C101.1 | U3.3 68.96,106.55 67.82,107.7 67.82,107.82 | 67.82,107.82 U3.2 | 67.82,107.82 67.18,107.82 66.79,107.43 C3.1 64.25,107.44 v61.72,107.44 | C1.1 116.09,78.72 v115.57,79.25 | v141.99,79.5 141.22,78.74 139.95,78.74 | C6.1 v140.46,87.12 | v143,97.28 C12.P$2
  Top 0.813: v42.04,55.5 C4.1 38.88,57.93 38.61,57.66 | 38.61,57.66 38.88,57.93 | U4.P$5 38.61,57.66
  Bottom 0.254: LED13.K 85.88,116.36 v85.09,115.57
  Bottom 0.61: POT6.P$6 212.78,44.78 212.09,45.47 | 225.04,45.47 225.63,44.88 POT7.P$6 | 238,45.47 238.49,44.98 POT8.P$6 | 5.84,22.35 5.84,22.86 JP1.P$1 | E$181.P$1 12.19,54.61 | PVOL.P$3 83.11,18.49 83.31,18.29 | PCUT.P$3 100.64,18.34 100.58,18.29 | JP4.2 16.76,111.51 | POT11.P$3 65.91,82.68 65.28,82.04 | SW13.P$6 62.48,115.06 62.48,113.28 | POT10.P$3 106.38,82.25 105.92,81.79 | 148.34,45.21 148.52,45.03 POT1.P$6 | 161.04,45.47 161.37,45.13 POT2.P$6 | 173.74,45.21 174.22,44.73 POT3.P$6 | POT9.P$3 110.69,106.63 110.49,106.43 | 186.69,45.47 187.08,45.08 POT4.P$6 | 199.39,45.47 199.93,44.93 POT5.P$6
  Bottom 0.813: E$1.P$2 44.45,123.7
  other vias: 80.01,102.87 82.55,102.87 85.09,102.87 74.93,113.03 85.09,105.41 74.93,115.57 85.09,107.95 74.93,118.11 85.09,110.49 74.93,120.65 85.09,113.03 74.93,123.19 74.93,125.73 85.09,118.11 77.47,125.73 85.09,120.65 80.01,125.73 85.09,123.19 82.55,125.73 85.09,125.73 87.63,125.73 90.17,125.73
  pour Bottom: -2.54,134.62 256.54,134.62 256.54,-2.54 -2.54,-2.54
  pour Top: 73.66,111.76 73.66,127 91.69,127 91.69,120.4 86.61,120.4 85.6,119.38 85.6,101.85 79.5,101.85 79.5,105.41 78.49,106.43 78.49,109.98 76.96,111.51 73.91,111.51
LED0
  Top 0.254: RN1.P$9 133.73,90.04 134.87,88.9 134.87,83.31 136.14,82.04 136.14,80.77 135.79,80.42 U1.P$13
LED0'  (via drill 0.61)
  Top 0.254: RN1.P$7 133.73,102.49 v133.6,102.62 99.82,102.62 97.79,100.58 v97.79,82.8 | v133.6,109.47 135.13,109.47 141.48,115.82 150.88,115.82 | LED5.A 203.07,116.46 202.44,115.82 150.88,115.82 | LED1.A 151.66,116.61 150.88,115.82 | v94.23,79.25 92.46,77.47 63.5,77.47 61.34,75.31 LED9.A
  Bottom 0.254: v97.79,82.8 v94.23,79.25 | v133.6,109.47 v133.6,102.62
LED1
  Top 0.254: RN1.P$8 132.46,90.55 134.37,88.65 134.37,86.11 132.23,83.97 U1.P$18
LED1'  (via drill 0.61)
  Top 0.254: RN1.P$6 132.46,101.47 v132.33,101.6 100.33,101.6 98.81,100.08 v98.81,81.79 | v132.33,108.2 135.13,108.2 141.99,115.06 160.02,115.06 160.27,114.81 v161.04,114.81 161.8,114.81 162.05,115.06 214.63,115.06 215.93,116.36 LED6.A | LED10.A 79.15,74.57 81.03,76.45 93.47,76.45 v95.25,78.23
  Bottom 0.254: v98.81,81.79 v95.25,78.23 | v132.33,108.2 v132.33,101.6 | LED2.A 164.52,116.51 162.81,114.81 v161.04,114.81
LED2
  Top 0.254: RN1.P$10 131.19,91.06 133.86,88.39 133.86,86.36 131.43,83.93 U1.P$17
LED2'  (via drill 0.61)
  Top 0.254: LED7.A 228.78,116.26 226.82,114.3 175.01,114.3 174.75,114.05 v173.99,114.05 173.23,114.05 172.97,114.3 162.05,114.3 161.54,113.79 160.53,113.79 160.02,114.3 142.49,114.3 135.13,106.93 v131.06,106.93 | v99.82,80.77 99.82,99.57 100.84,100.58 v131.06,100.58 131.19,100.46 RN1.P$4 | LED11.A 96.95,73.48 96.27,74.17 v96.27,77.22
  Bottom 0.254: v99.82,80.77 v96.27,77.22 | v131.06,106.93 v131.06,100.58 | LED3.A 177.37,116.66 174.75,114.05 v173.99,114.05
LED3
  Top 0.254: U1.P$16 130.63,83.9 133.35,86.61 133.35,88.14 129.92,91.57 RN1.P$11
LED3'  (via drill 0.61)
  Top 0.254: RN1.P$5 129.92,99.44 v129.79,99.57 101.35,99.57 100.84,99.06 v100.84,79.76 | v129.79,105.66 135.13,105.66 143,113.54 160.02,113.54 160.27,113.28 161.8,113.28 162.05,113.54 172.72,113.54 173.23,113.03 174.75,113.03 175.26,113.54 185.67,113.54 185.93,113.28 v186.69,113.28 187.45,113.28 187.71,113.54 239.52,113.54 241.63,115.65 LED8.A | LED12.A 114.76,73.2 114.3,73.66 99.82,73.66 v97.28,76.2
  Bottom 0.254: v100.84,79.76 v97.28,76.2 | v129.79,105.66 v129.79,99.57 | LED4.A 190.22,116.81 v186.69,113.28
LINEOUT
  Top 0.406: JP1.P$3 12.53,27.86 14.22,26.16 14.22,16 | 14.22,16 14.22,9.91 18.03,6.1 59.44,6.1 61.72,8.38 R109.1 64.77,8.38 | JP1.P$2 12.37,17.86 14.22,16
MIDIIN4
  Top 0.254: RN2.P$11 15.11,73.53 17.53,75.95 17.53,94.23 15.24,96.52 JP3.4
MIDIIN5  (via drill 0.61)
  Top 0.254: D14.P$2 25.02,56.13 24.64,55.75 23.5,55.75 v14.1,65.15 | 15.24,86.49 15.24,86.61 | 15.24,86.49 JP3.5 | v14.1,74.55 15.24,75.69 15.24,86.49
  Top 0.61: D14.P$2 28.08,57.04 28.7,57.66 30.23,57.66 30.42,57.46 | 30.42,57.46 30.48,57.4 | 30.42,57.46 U4.P$8
  Bottom 0.254: v14.1,65.15 v14.1,74.55
MIDIOUT4  (via drill 0.61)
  Top 0.254: RN2.P$9 11.3,77.98 v11.43,77.98 | JP4.4 15.24,116.59 20.32,111.51 v20.32,79.5
  Bottom 0.254: v11.43,77.98 18.8,77.98 v20.32,79.5
MIDIOUT5  (via drill 0.61)
  Top 0.254: RN2.P$8 12.57,76.96 v12.45,76.96 | v20.07,77.72 19.3,78.49 19.3,102.11 14.99,106.43 JP4.5
  Bottom 0.254: v12.45,76.96 19.3,76.96 v20.07,77.72
MOD
  Top 0.254: U1.P$28 121.51,74.02 120.4,72.9 118.11,72.9 115.82,75.18 100.84,75.18 93.73,82.3 69.6,82.3 68.45,83.44 POT11.P$1
N$16
  Top 0.254: D14.P$1 25.02,61.47 24.51,61.98 19.05,61.98 15.11,65.91 15.11,68.71 15.06,68.76 | 15.06,68.76 14.99,68.83 | 15.06,68.76 RN2.P$5
  Top 0.61: U4.P$9 30.48,60.2 30.37,60.31 D14.P$1
R107
  Top 0.508: U103.5 78.04,8.96 77.47,8.38 74.93,8.38 | R109.2 74.93,8.38 | U103.2 79.94,14.29 78.74,15.49 76.96,15.49 75.69,14.22 75.69,9.14 74.93,8.38
RX-RC7  (via drill 0.61)
  Top 0.254: v90.17,49.78 88.65,49.78 87.88,50.55 61.98,50.55 v60.71,51.82 | U1.P$34 122.24,81.22 121.92,81.53 121.92,82.8 122.68,83.57 v122.68,85.09 | U4.P$6 40.64,55.12 41.66,54.1 45.97,54.1 47.75,52.32 | 47.75,52.32 v48.77,51.31 | 47.75,52.32 R2.2
  Top 0.406: U4.P$6 38.73,55.12
  Bottom 0.254: v90.17,49.78 103.89,49.78 124.46,70.36 124.46,84.58 123.95,85.09 v122.68,85.09 | v48.77,51.31 49.28,51.82 v60.71,51.82
S$1
  Top 0.254: D1.P$1 152.4,17.78 154.94,20.32 SW1.P$1
S$2
  Top 0.254: D2.P$1 165.35,17.78 167.8,20.22 SW2.P$1
S$3
  Top 0.254: D3.P$1 178.05,17.78 180.65,20.37 SW3.P$1
S$4
  Top 0.254: D4.P$1 191.01,17.78 193.5,20.27 SW4.P$1
S$5
  Top 0.254: D5.P$1 203.96,17.78 206.35,20.17 SW5.P$1
S$6
  Top 0.254: D6.P$1 216.66,17.78 219.21,20.32 SW6.P$1
S$7
  Top 0.254: D7.P$1 229.62,17.78 232.06,20.22 SW7.P$1
S$8
  Top 0.254: D8.P$1 242.32,17.78 244.91,20.37 SW8.P$1
S$9
  Top 0.508: U101.3 93.15,34.61 92.71,35.05 | 92.71,35.05 92.2,35.56 R102.1 | R101.1 92.2,38.86 92.71,38.35 92.71,35.05
S$10  (via drill 0.61)
  Top 0.508: SW14.P$2 60.63,25.73 61.98,24.38 v76.2,24.38
  Bottom 0.508: PVOL.P$2 88.19,23.82 87.63,24.38 v76.2,24.38
S$11
  Top 0.508: U101.2 100.26,34.61 100.58,34.29 102.62,34.29 | 102.62,34.29 106.43,34.29 | 106.43,34.29 106.93,34.8 R103.2 | R105.2 103.12,34.8 102.62,34.29 | 106.43,34.29 108.71,34.29 111,32 112.52,32 116.84,36.32 | D101.P$2 117.35,36.83 116.84,36.32 | D102.P$1 123.7,36.83 123.19,36.32 116.84,36.32
S$13
  Top 0.254: SW9.P$1 66.25,56.6 66.55,56.9 66.55,59.44 67.17,60.06 D9.P$1
S$14
  Top 0.254: SW10.P$1 84.03,56.6 84.33,56.9 84.33,59.44 84.95,60.06 D10.P$1
S$15
  Top 0.254: SW11.P$1 101.81,56.6 102.11,56.9 102.11,59.44 102.73,60.06 D11.P$1
S$16
  Top 0.254: SW12.P$1 119.59,56.6 119.89,56.9 119.89,59.44 120.51,60.06 D12.P$1
S$22
  Top 0.254: R1.2 96.52,117.86 96.01,118.36 90.93,118.36 90.58,118.01 LED13.A
S$23
  Top 0.508: R106.1 121.94,11.45 122.68,12.19 122.68,16.26 120.7,18.24 PRES.P$1 120.7,21.29 120.65,21.34 120.65,25.15 119.9,25.89 R111.1
S$25
  Bottom 0.254: E$14.1 E$24.1 E$25.1
S$27
  Top 0.254: U3.1 65.66,109.09 65,109.75 SW13.P$2
S$28
  Top 0.508: C101.2 111.76,38.86 111,39.62 107.7,39.62 106.93,38.86 R103.1
S$29  (via drill 0.61)
  Top 0.508: D102.P$2 123.7,43.94 122.94,44.7 116.59,44.7 | D101.P$1 117.35,43.94 116.59,44.7 | 116.59,44.7 115.32,44.7 111.25,40.64 105.92,40.64 104.65,39.37 102.62,39.37 | R105.1 103.12,38.86 102.62,39.37 | 102.62,39.37 v100.84,39.37 95.76,39.37 95.5,39.12 95.5,36.83 95.82,36.51 U101.5 | R110.1 v95,29.46
  Bottom 0.508: v100.84,39.37 102.36,39.37 103.12,38.61 103.12,34.54 100.58,32 98.3,32 96.52,30.23 95.76,30.23 v95,29.46
S$30  (via drill 0.61)
  Top 0.508: C102.1 85.85,10.41 v86.87,9.4 | R104.1 100.31,11.45 v100.33,11.43 100.4,11.5 U102.3
  Bottom 0.508: v86.87,9.4 98.3,9.4 v100.33,11.43
S$31  (via drill 0.61)
  Top 0.406: 105.66,21.08 105.72,21.13 PCUT.P$2
  Top 0.508: C104.1 113.3,11.45 114.05,12.19 114.05,18.29 111.25,21.08 105.66,21.08 | R104.2 97.28,14.73 97.79,15.24 100.08,15.24 v100.58,14.73
  Bottom 0.508: PCUT.P$2 105.72,19.1 101.35,14.73 v100.58,14.73
S$32  (via drill 0.61)
  Top 0.508: 116.33,15.24 C103.2 | R107.2 93.47,10.41 94.23,9.65 | 94.23,9.65 v108.46,9.65 | R108.1 89.66,10.16 90.17,9.65 94.23,9.65 | R106.2 120.14,14.99 119.63,15.49 116.59,15.49 116.33,15.24 | v116.33,15.49 116.33,15.24
  Bottom 0.508: v116.33,15.49 110.49,9.65 v108.46,9.65
S$33
  Top 0.508: C103.1 116.33,10.41 115.57,9.65 110.49,9.65 108.65,11.5 U102.2
S$34
  Bottom 0.254: E$23.1 E$20.1 E$16.1
S$35  (via drill 0.61)
  Top 0.508: U103.3 79.94,9.21 80.26,8.89 81.03,8.89 81.28,9.14 v81.28,15.49
  Bottom 0.508: PVOL.P$1 85.65,21.13 85.6,21.08 85.6,17.78 83.31,15.49 v81.28,15.49
S$36
  Bottom 0.254: E$35.1 E$34.1 E$31.1
S$37
  Bottom 0.254: E$28.1 E$32.1 E$33.1
S$38
  Bottom 0.254: E$40.1 E$43.1 E$44.1
S$39
  Bottom 0.254: E$42.1 E$41.1 E$36.1
S$40
  Bottom 0.254: E$52.1 E$51.1 E$48.1
S$41
  Bottom 0.254: E$45.1 E$49.1 E$50.1
S$42
  Bottom 0.254: E$56.1 E$59.1 E$60.1
S$43
  Bottom 0.254: E$58.1 E$57.1 E$53.1
S$44
  Bottom 0.254: E$92.1 E$91.1 E$88.1
S$45
  Bottom 0.254: E$85.1 E$89.1 E$90.1
S$46
  Bottom 0.254: E$100.1 E$103.1 E$104.1
S$47
  Bottom 0.254: E$102.1 E$101.1 E$97.1
S$48
  Bottom 0.254: E$116.1 E$115.1 E$112.1
S$49
  Bottom 0.254: E$109.1 E$113.1 E$114.1
S$50
  Bottom 0.254: E$124.1 E$127.1 E$128.1
S$51
  Bottom 0.254: E$126.1 E$125.1 E$121.1
S$52
  Bottom 0.254: E$140.1 E$139.1 E$136.1
S$53
  Bottom 0.254: E$133.1 E$137.1 E$138.1
S$54
  Bottom 0.254: E$148.1 E$151.1 E$152.1
S$55
  Bottom 0.254: E$150.1 E$149.1 E$145.1
S$57
  Top 0.508: R110.2 102.6,23.89 103.12,23.37 103.12,21.34 103.17,21.29 PCUT.P$1
S$58
  Bottom 0.254: E$27.1 E$26.1 E$19.1
S$59
  Bottom 0.254: E$17.1 E$21.1 E$22.1
SELECT0  (via drill 0.61)
  Top 0.254: LED4.K 187.68,119.15 186.69,120.14 174.24,120.14 | LED3.K 174.83,119.56 174.24,120.14 | LED2.K 161.98,119.46 161.29,120.14 | 161.29,120.14 174.24,120.14 | 157.48,30.48 170.18,30.48 | 170.18,30.48 182.88,30.48 184.4,28.96 SW4.P$3 | 144.78,30.48 140.97,30.48 137.41,34.04 v137.41,65.79 | 144.78,30.48 157.48,30.48 | U1.P$11 136.47,78.82 v137.41,79.76 | v136.91,115.82 136.91,116.84 140.21,120.14 148.59,120.14 | v137.41,82.55 136.91,83.06 v136.91,101.35 | SW1.P$3 145.84,29.42 144.78,30.48 | SW2.P$3 158.7,29.26 157.48,30.48 | SW3.P$3 171.55,29.11 170.18,30.48 | 148.59,120.14 161.29,120.14 | LED1.K 149.12,119.61 148.59,120.14
  Bottom 0.254: v136.91,115.82 v136.91,101.35 | v137.41,65.79 v137.41,79.76 v137.41,82.55
SELECT1  (via drill 0.61)
  Top 0.254: LED8.K 239.09,119.3 238.25,120.14 225.81,120.14 | LED7.K 226.24,119.71 225.81,120.14 | LED6.K 213.38,119.61 212.85,120.14 | 212.85,120.14 225.81,120.14 | LED5.K 200.53,119.76 200.15,120.14 | v138.43,64.77 138.43,34.54 141.48,31.5 194.56,31.5 195.58,30.48 | U1.P$9 136.08,73.22 v138.43,70.87 | v138.43,83.82 137.92,84.33 v137.92,102.62 | SW5.P$3 197.25,28.81 195.58,30.48 | 222.25,30.48 234.95,30.48 235.81,29.62 SW8.P$3 | 222.25,30.48 209.55,30.48 | 209.55,30.48 195.58,30.48 | SW6.P$3 210.1,29.93 209.55,30.48 | SW7.P$3 222.96,29.77 222.25,30.48 | v137.92,114.55 136.4,114.55 135.64,115.32 135.64,116.33 139.95,120.65 194.56,120.65 195.07,120.14 200.15,120.14 | 200.15,120.14 212.85,120.14
  Bottom 0.254: v138.43,83.82 v138.43,70.87 v138.43,64.77 | v137.92,102.62 v137.92,114.55
SELECT2
  Top 0.254: SW9.P$2 66.18,61.1 67.56,62.48 85.34,62.48 | 85.34,62.48 103.12,62.48 | 103.12,62.48 120.9,62.48 | SW10.P$2 83.96,61.1 85.34,62.48 | SW11.P$2 101.74,61.1 103.12,62.48 | SW12.P$2 119.52,61.1 120.9,62.48 | U1.P$29 122.24,73.22 121.92,72.9 121.92,68.58 | 121.92,68.58 125.98,64.52 125.98,63.25 125.22,62.48 120.9,62.48 | LED9.K 58.8,67.18 59.94,66.04 77.98,66.04 | 113.54,66.04 120.9,66.04 121.92,67.06 121.92,68.58 | 113.54,66.04 95.76,66.04 | 95.76,66.04 77.98,66.04 | LED10.K 76.61,67.41 77.98,66.04 | LED11.K 94.41,67.39 95.76,66.04 | LED12.K 112.22,67.36 113.54,66.04
SLIDER0
  Top 0.254: U1.P$5 136.94,76.42 138.94,74.42 150.37,74.42 152.27,76.32 152.27,105.8 | POT1.P$4 152.27,105.8 | 152.27,105.8 152.15,105.92
SLIDER1
  Top 0.254: U1.P$6 136.73,75.62 138.68,73.66 163.32,73.66 165.12,75.46 165.12,105.64 165.1,105.66 165.12,105.69 POT2.P$4
SLIDER2
  Top 0.254: U1.P$7 136.51,74.82 138.43,72.9 176.02,72.9 177.97,74.85 177.97,105.75 177.94,105.78 | 177.94,105.78 177.8,105.92 | POT3.P$4 177.94,105.78
SLIDER3
  Top 0.254: U1.P$8 136.3,74.02 138.18,72.14 188.72,72.14 190.83,74.24 190.83,105.59 190.75,105.66 190.83,105.74 POT4.P$4
SLIDER4
  Top 0.254: U1.P$44 133.03,70.17 133.6,69.6 139.7,69.6 141.48,71.37 201.42,71.37 203.68,73.63 203.68,105.63 203.71,105.66 203.68,105.69 POT5.P$4
SLIDER5
  Top 0.254: U1.P$43 132.23,69.7 133.1,68.83 139.95,68.83 141.73,70.61 213.87,70.61 216.53,73.27 216.53,105.53 216.66,105.66 216.55,105.78 POT6.P$4
SLIDER6
  Top 0.254: U1.P$42 131.43,69.23 132.59,68.07 140.21,68.07 141.99,69.85 226.82,69.85 229.38,72.41 229.38,105.69 229.48,105.78 | 229.48,105.78 229.62,105.92 | 229.48,105.78 POT7.P$4
SLIDER7
  Top 0.254: U1.P$41 130.63,68.76 132.08,67.31 140.46,67.31 142.24,69.09 239.52,69.09 242.24,71.8 242.24,105.49 242.06,105.66 242.18,105.78 POT8.P$4
STEPS  (via drill 0.61)
  Top 0.254: U1.P$27 121.3,74.82 120.4,73.91 v118.87,73.91
  Bottom 0.254: POT10.P$1 108.92,82.09 117.09,73.91 v118.87,73.91
TEMPO  (via drill 0.61)
  Top 0.254: U1.P$26 121.34,75.62 120.65,74.93 v119.89,74.93
  Bottom 0.254: POT9.P$1 113.23,103.17 117.09,99.31 117.09,85.6 113.54,82.04 113.54,78.23 116.84,74.93 v119.89,74.93
TX-RC6  (via drill 0.61)
  Top 0.254: v89.41,48.77 88.39,48.77 87.12,50.04 60.96,50.04 v60.71,50.29 | U1.P$24 125.03,85.03 v123.95,86.11 | v21.08,51.31 21.08,55.5 12.57,64.01 RN2.P$6
  Bottom 0.254: v89.41,48.77 103.63,48.77 124.97,70.1 124.97,85.6 124.46,86.11 v123.95,86.11 | v21.08,51.31 46.99,51.31 48.01,50.29 v60.71,50.29
VCAP
  Top 0.254: U1.P$12 136,79.62 137.16,80.77 139.95,80.77 140.46,81.28 C6.2
VDD  (via drill 0.61)
  Top 0.254: U2.14 68.07,44.7 67.06,43.69 67.06,43.43 67.06,43.18 68.07,42.16 U2.16 | U2.12 67.82,47.24 67.56,47.5 62.23,47.5 60.96,46.23 60.96,42.42
  Top 0.508: U1.P$25 117.89,76.42 117.6,76.71 | U1.P$1 137.92,77.22 138.43,76.71 139.95,76.71 C5.2 | U103.1 78.04,13.65 v77.98,13.72
  Top 0.61: 114.81,104.14 94.74,104.14 | 138.68,104.14 114.81,104.14 | 138.68,104.14 138.94,104.14 140.21,102.87 140.21,96.52 143.51,93.22 143.51,78.74 141.49,76.72 C5.2 | POT9.P$2 115.77,105.11 114.81,104.14 | POT10.P$2 111.45,78.18 109.98,76.71 | POT11.P$2 74.91,85.32 77.72,88.14 77.72,96.52 | U3.5 77.09,105.28 77.72,104.65 77.72,99.57 | 77.72,99.31 77.72,99.57 | 77.72,96.52 77.72,99.31 | 77.72,96.52 78.74,95.5 82.8,95.5 | 82.8,95.5 86.11,95.5 94.74,104.14 | 52.32,63.25 52.32,75.44 59.44,82.55 59.44,94.49 62.99,98.04 76.45,98.04 77.72,99.31 | 52.32,63.25 52.32,50.29 | 59.69,41.91 59.69,39.88 | 59.69,39.88 59.69,33.53 60.71,32.51 73.15,32.51 78.23,27.43 v78.23,20.32 80.01,18.54 90.93,18.54 | U101.1 100.14,36.51 v100.33,36.32 | v92.46,32.77 92.46,20.07 90.93,18.54 | U102.1 108.9,13.4 v108.97,13.46 | 90.93,18.54 107.19,18.54 v108.71,17.02 | C13.P$1 62.99,41.4 62.48,41.91 60.45,41.91 | 59.69,41.91 60.45,41.91 | 15.75,48.51 17.78,46.48 | 17.78,46.48 17.78,34.04 | 17.78,34.04 17.78,21.59 19.05,20.32 E$74.1 | 15.75,48.51 50.55,48.51 52.32,50.29 | E$68.1 18.54,45.72 17.78,46.48 | E$18.1 18.8,33.02 17.78,34.04 | C7.2 57.4,37.59 59.69,39.88 | 62.48,43.43 61.98,43.43 60.96,42.42 60.45,41.91 | 62.48,43.43 67.06,43.43 U2.15 | 52.32,50.29 52.32,43.18 53.59,41.91 59.69,41.91 | 143,107.44 C12.P$1 | C2.2 63.26,44.21 62.48,43.43 | C11.P$1 78.23,99.06 77.72,99.57 | R1.1 96.52,105.92 94.74,104.14 | E$180.P$1 12.19,57.15 14.99,54.36 | C4.2 43.42,59.93 45.72,62.23 48.77,62.23 | 48.77,62.23 51.31,62.23 52.32,63.25 | R2.1 47.75,61.21 48.77,62.23 | 82.8,95.5 101.6,76.71 109.98,76.71 | C1.2 117.6,76.71 109.98,76.71 | POT8.P$1 238.49,111.02 238,111.51 225.04,111.51
  Top 0.61: 147.83,111.51 160.53,111.51 | 160.53,111.51 173.48,111.51 | 173.48,111.51 186.44,111.51 | 186.44,111.51 199.14,111.51 | 199.14,111.51 212.09,111.51 | 212.09,111.51 225.04,111.51 | POT7.P$1 225.63,110.92 225.04,111.51 | POT6.P$1 212.78,110.82 212.09,111.51 | POT4.P$1 187.08,110.87 186.44,111.51 | POT3.P$1 174.22,110.77 173.48,111.51 | POT2.P$1 161.37,110.66 160.53,111.51 | POT1.P$1 148.52,110.82 147.83,111.51 | 147.83,111.51 144.02,111.51 143,110.49 143,107.44 | 143,107.44 143,106.93 140.21,104.14 138.68,104.14 | 15.75,48.51 14.99,49.28 14.99,54.36 | RN2.P$7 11.3,63.63 14.99,59.94 14.99,54.36 | POT5.P$1 199.93,110.71 199.14,111.51
  Top 0.813: C4.2 38.73,59.93 38.73,60.2 U4.P$4
  Bottom 0.508: v77.98,13.72 77.98,20.07 v78.23,20.32
  Bottom 0.61: v100.33,36.32 99.06,36.32 95.5,32.77 v92.46,32.77 | v108.71,17.02 108.97,16.76 v108.97,13.46 | E$67.1 23.11,45.72 | E$68.1 E$67.1 | E$67.1 E$69.1 E$70.1 E$71.1 E$72.1 E$94.1 E$106.1 E$118.1 E$130.1 E$142.1 E$154.1 | E$18.1 E$13.1 E$30.1 E$39.1 E$47.1 E$55.1 E$87.1 E$99.1 E$111.1 E$123.1 E$135.1 E$147.1 | E$74.1 E$73.1 E$75.1 E$76.1 E$77.1 E$78.1 E$95.1 E$107.1 E$119.1 E$131.1 E$143.1 E$155.1
VIN
  Top 0.61: D13.P$2 57.15,101.09 55.63,102.62 55.63,107.19 51.31,111.51 34.29,111.51 31.75,114.05 E$1.P$1
VIN'  (via drill 0.61)
  Top 0.61: U3.4 67.69,105.28 v67.56,105.16 67.31,105.41 67.29,105.43 C3.2 64.26,103.38 64.77,102.87 64.77,101.35 64.52,101.09 D13.P$1
  Bottom 0.254: SW13.P$3 67.56,115.06 v67.56,105.16
VPP  (via drill 0.61)
  Top 0.254: v54.1,63.75 v124.71,63.75 | U1.P$40 129.83,63.97 v130.05,63.75 | v18.8,63.75 v50.04,63.75
  Bottom 0.254: v124.71,63.75 v130.05,63.75 | v50.04,63.75 v54.1,63.75 | v18.8,63.75 16.76,63.75 12.7,59.69 E$12.P$1

## Text on the board
Bottom: NTH REV D - (C) 2012 NTHSYNTH LLC - DESIGNED BY JOHN STASKEVICH AND KEVIN HOLLAND - NTHSYNTH.COM
tPlace: MIDI OUT | MIDI IN | VDD | ICSP | GND | VDD | GND | VDD | AUDIO OUT | GND
bPlace: BATTERY | VDD | JP2 | GND | VDD | GND | VDD | GND
bDocu: SERVICE DOOR